# EAGLE board PCB components (EAGLE 7.2.0)
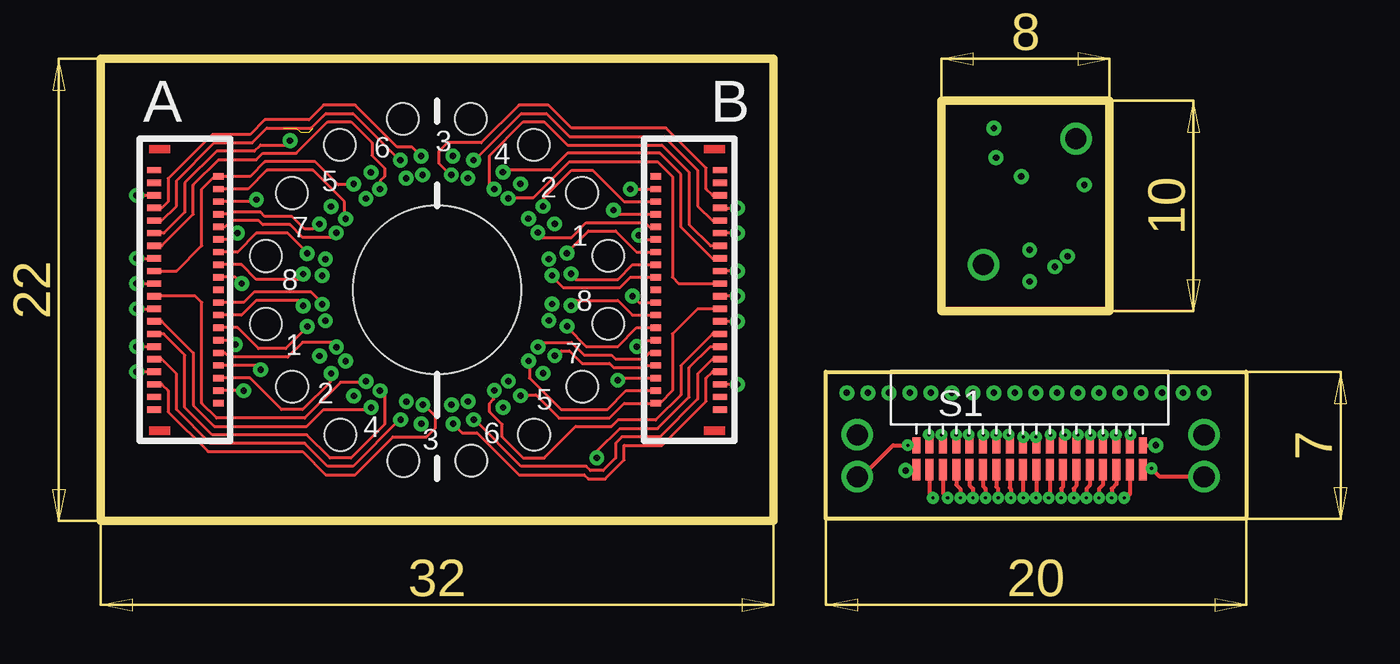
[diagram p0: board, top side]
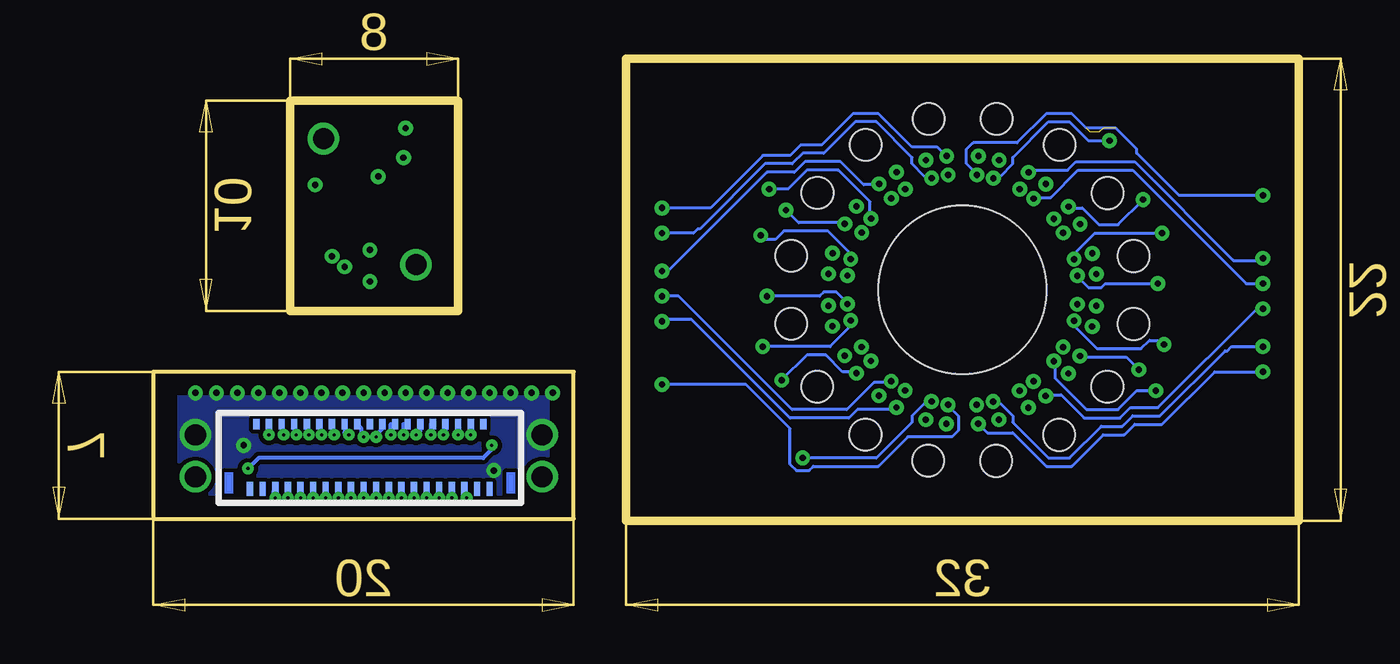
[diagram p1: board, bottom side, seen from below]

Size 54.5 x 22 mm. Coordinates in mm from the lower left corner, seen from the top.
Outline: 40,20 40,10 48,10 48,20 40,20
Outline: 0,22 32,22 32,0 0,0 0,22
Outline: 34.5,7.1 54.5,7.1 54.5,0.1 34.5,0.1 34.5,7.1
Copper layers (1*16): Top 0.035mm / dielectric 1.5mm / Bottom 0.035mm
Design rules "default": minimum track width 10mil, minimum drill 24mil, track to track 8mil, track to pad 8mil, pad to pad 8mil, via to via 8mil, smd to smd 8mil, copper to edge 40mil, drill to drill 8mil, minimum pad ring 10mil, minimum via ring 8mil, stop-mask expansion 4mil, vias tented up to drill 0mil, thermal gap 10mil
Holes 1.5 mm at 14.37,19.14 11.38,17.9 9.09,15.61 7.86,12.61 7.86,9.37 9.1,6.38 11.39,4.09 14.39,2.86 17.63,2.86 20.62,4.1 22.91,6.39 24.14,9.39 24.14,12.63 22.9,15.62 20.61,17.91 17.61,19.14
Holes 8 mm at 16,11

## Footprints (pad centres in the part's own frame; a part is rotated, then mirrored left to right if it is on the bottom)
OMNETICS_A79025 = smd 0.381 x 0.762: B1 -5.397,-1.016; B2 -4.763,-1.016; B3 -4.128,-1.016; B4 -3.493,-1.016; B5 -2.857,-1.016; B6 -2.223,-1.016; B7 -1.587,-1.016; B8 -0.953,-1.016; B9 -0.318,-1.016; B10 0.318,-1.016; B11 0.953,-1.016; B12 1.587,-1.016; B13 2.223,-1.016; B14 2.857,-1.016; B15 3.493,-1.016; B16 4.128,-1.016; B17 4.763,-1.016; B18 5.397,-1.016 | smd 0.381 x 1.016: T1 -5.397,-2.159; T2 -4.763,-2.159; T3 -4.128,-2.159; T4 -3.493,-2.159; T5 -2.857,-2.159; T6 -2.223,-2.159; T7 -1.587,-2.159; T8 -0.953,-2.159; T9 -0.318,-2.159; T10 0.318,-2.159; T11 0.953,-2.159; T12 1.587,-2.159; T13 2.223,-2.159; T14 2.857,-2.159; T15 3.493,-2.159; T16 4.128,-2.159; T17 4.763,-2.159; T18 5.397,-2.159
FPC_0.3MM_39P_BL101 = smd 0.3 x 0.5: P$1 -5.4,1.6; P$2 -4.8,1.6; P$3 -4.2,1.6; P$4 -3.6,1.6; P$5 -3,1.6; P$6 -2.4,1.6; P$7 -1.8,1.6; P$8 -1.2,1.6; P$9 -0.6,1.6; P$10 0,1.6; P$11 0.6,1.6; P$12 1.2,1.6; P$13 1.8,1.6; P$14 2.4,1.6; P$15 3,1.6; P$16 3.6,1.6; P$17 4.2,1.6; P$18 4.8,1.6; P$19 5.4,1.6 | smd 0.3 x 0.67: P$20 5.7,-1.465; P$21 5.1,-1.465; P$22 4.5,-1.465; P$23 3.9,-1.465; P$24 3.3,-1.465; P$25 2.7,-1.465; P$26 2.1,-1.465; P$27 1.5,-1.465; P$28 0.9,-1.465; P$29 0.3,-1.465; P$30 -0.3,-1.465; P$31 -0.9,-1.465; P$32 -1.5,-1.465; P$33 -2.1,-1.465; P$34 -2.7,-1.465; P$35 -3.3,-1.465; P$36 -3.9,-1.465; P$37 -4.5,-1.465; P$38 -5.1,-1.465; P$39 -5.7,-1.465

## Placement (x,y rotation side)
S1  OMNETICS_A79025  [OMNETICS_A79025]  44.2,4.6 0 top
U$1  FPC_0.3MM_39P  [FPC_0.3MM_39P_BL101]  4,11 270 top
U$2  FPC_0.3MM_39P  [FPC_0.3MM_39P_BL101]  28,11 90 top
U$3  FPC_0.3MM_39P  [FPC_0.3MM_39P_BL101]  44.2,3 0 bottom

## Library data of the parts
S1 = RHD2000
U$1-U$3 = wanlab

## Nets
B1: U$2.P$18
B2: U$1.P$18
B3: U$1.P$17
B4: U$1.P$16
B5: U$1.P$15
B6: U$1.P$14
B7: U$1.P$13
B8: U$1.P$12
B9: U$1.P$11
B10: U$1.P$9
B11: U$1.P$8
B12: U$1.P$7
B13: U$1.P$6
B14: U$1.P$5
B15: U$1.P$4
B16: U$1.P$3
B17: U$1.P$2
B18: U$2.P$2
B19: U$2.P$17
B20: U$2.P$16
B21: U$2.P$15
B22: U$2.P$14
B23: U$2.P$13
B24: U$2.P$12
B25: U$2.P$11
B26: U$2.P$9
B27: U$2.P$8
B28: U$2.P$7
B29: U$2.P$6
B30: U$2.P$5
B31: U$2.P$4
B32: U$2.P$3
B33: S1.B2 U$3.P$18
B34: S1.B17 U$3.P$2
B35: S1.B3 U$3.P$17
B36: S1.B4 U$3.P$16
B37: S1.B5 U$3.P$15
B38: S1.B6 U$3.P$14
B39: S1.B7 U$3.P$13
B40: S1.B8 U$3.P$12
B41: S1.B9 U$3.P$11
B42: S1.B10 U$3.P$9
B43: S1.B11 U$3.P$8
B44: S1.B12 U$3.P$7
B45: S1.B13 U$3.P$6
B46: S1.B14 U$3.P$5
B47: S1.B15 U$3.P$4
B48: S1.B16 U$3.P$3
GND: S1.B18 S1.T1
REF: S1.B1 S1.T18
T1: U$2.P$22
T2: U$1.P$22
T3: U$1.P$23
T4: U$1.P$24
T5: U$1.P$25
T6: U$1.P$26
T7: U$1.P$27
T8: U$1.P$28
T9: U$1.P$29
T10: U$1.P$30
T11: U$1.P$1 U$1.P$31
T12: U$1.P$32
T13: U$1.P$33
T14: U$1.P$34
T15: U$1.P$35
T16: U$1.P$36
T17: U$1.P$37
T18: U$2.P$23
T19: U$2.P$24
T20: U$2.P$25
T21: U$2.P$26
T22: U$2.P$27
T23: U$2.P$28
T24: U$2.P$29
T25: U$2.P$30
T26: U$2.P$1 U$2.P$31
T27: U$2.P$32
T28: U$2.P$33
T29: U$2.P$34
T30: U$2.P$35
T31: U$2.P$36
T32: U$2.P$37
T33: S1.T2 U$3.P$22
T34: S1.T3 U$3.P$23
T35: S1.T4 U$3.P$24
T36: S1.T5 U$3.P$25
T37: S1.T6 U$3.P$26
T38: S1.T7 U$3.P$27
T39: S1.T8 U$3.P$28
T40: S1.T9 U$3.P$29
T41: S1.T10 U$3.P$30
T42: S1.T11 U$3.P$31
T43: S1.T12 U$3.P$32
T44: S1.T13 U$3.P$33
T45: S1.T14 U$3.P$34
T46: S1.T15 U$3.P$35
T47: S1.T16 U$3.P$36
T48: S1.T17 U$3.P$37

## Tracks (layer width: path | path; a pad name or v marks a point on that pad's centre or on a via)
B1  (via drill 0.3)
  Top 0.15: v25.2,15.8 U$2.P$18
  Bottom 0.15: v25.2,15.8 24.3,15.8 23.4,16.7 21.9,16.7 20.4,15.2 20.4,14.4 v20.35,14.39
B2  (via drill 0.3)
  Top 0.15: v6.8,6.2 U$1.P$18
  Bottom 0.15: v6.8,6.2 7.7,6.2 8.6,5.3 10.1,5.3 11.6,6.8 11.6,7.6 v11.65,7.61
B3  (via drill 0.3)
  Top 0.15: U$1.P$17 7.1,6.8 8.6,5.3 9.6,5.3 10.9,6.6 10.9,7 v10.96,7.02
B4  (via drill 0.3)
  Top 0.15: U$1.P$16 7.4,7.4 7.5,7.3 v7.6,7.2
  Bottom 0.15: v7.6,7.2 8.2,7.8 10.4,7.8 v10.4,7.86
B5  (via drill 0.3)
  Top 0.15: U$1.P$15 5.9,8 6.1,7.8 8.9,7.8 9.6,8.5 11,8.5 11.2,8.3 v11.21,8.27
B6  (via drill 0.3)
  Top 0.15: U$1.P$14 6.2,8.6 v6.4,8.4
  Bottom 0.15: v10.68,9.53 10.6,9.5 10.6,9.2 9.6,8.2 7.5,8.2 7.1,8.6 6.4,8.6 v6.4,8.4
B7  (via drill 0.3)
  Top 0.15: U$1.P$13 6.5,9.2 7.5,8.2 8.8,8.2 9.8,9.2 v9.82,9.26
B8  (via drill 0.3)
  Top 0.15: U$1.P$12 6.7,9.8 7.4,10.5 9.4,10.5 9.6,10.3 v9.63,10.24
B9  (via drill 0.3)
  Top 0.15: U$1.P$11 6.8,10.4 7.3,10.9 10,10.9 10.5,10.4 v10.53,10.31
B10  (via drill 0.3)
  Top 0.15: U$1.P$9 6.4,11.6 v6.7,11.3
  Bottom 0.15: v6.7,11.3 9.2,11.3 9.4,11.1 10,11.1 10.5,11.6 v10.53,11.68
B11  (via drill 0.3)
  Top 0.15: U$1.P$8 6.7,12.2 7.4,11.5 9.4,11.5 9.6,11.7 v9.62,11.75
B12  (via drill 0.3)
  Top 0.15: U$1.P$7 6.5,12.8 7.4,13.7 8.9,13.7 9.8,12.8 v9.82,12.73
B13  (via drill 0.3)
  Top 0.15: U$1.P$6 6.2,13.4 v6.5,13.7
  Bottom 0.15: v6.5,13.7 9.7,13.7 10.6,12.8 10.6,12.5 v10.68,12.46
B14  (via drill 0.3)
  Top 0.15: v11.2,13.72 11.2,13.7 11,13.5 9.6,13.5 9,14.1 7.7,14.1 7.5,14.3 6.2,14.3 5.9,14 U$1.P$5
B15  (via drill 0.3)
  Top 0.15: U$1.P$4 6,14.6 6.1,14.7 7.6,14.7 7.8,14.5 9.1,14.5 9.7,13.9 10.1,13.9 10.3,14.1 v10.4,14.13
B16  (via drill 0.3)
  Top 0.15: U$1.P$3 7.3,15.2 v7.4,15.3
  Bottom 0.15: v7.4,15.3 8.6,14.1 9.5,14.1 10.3,14.9 10.9,14.9 v10.95,14.97
B17  (via drill 0.3)
  Top 0.15: U$1.P$2 7,15.8 7.9,16.7 10.1,16.7 11.6,15.2 11.6,14.4 v11.65,14.38
B18  (via drill 0.3)
  Top 0.15: U$2.P$2 25,6.2 24.1,5.3 21.9,5.3 20.4,6.8 20.4,7.6 v20.35,7.62
B19  (via drill 0.3)
  Top 0.15: U$2.P$17 24.9,15.2 23.4,16.7 22.4,16.7 21.1,15.4 21.1,15 v21.04,14.98
B20  (via drill 0.3)
  Top 0.15: U$2.P$16 24.6,14.6 24.5,14.7 v24.4,14.8
  Bottom 0.15: v24.4,14.8 23.8,14.2 21.6,14.2 v21.6,14.14
B21  (via drill 0.3)
  Top 0.15: U$2.P$15 26.1,14 25.9,14.2 23.1,14.2 22.4,13.5 21,13.5 20.8,13.7 v20.79,13.73
B22  (via drill 0.3)
  Top 0.15: U$2.P$14 25.8,13.4 v25.6,13.6
  Bottom 0.15: v21.32,12.47 21.4,12.5 21.4,12.8 22.4,13.8 24.5,13.8 24.9,13.4 25.6,13.4 v25.6,13.6
B23  (via drill 0.3)
  Top 0.15: U$2.P$13 25.5,12.8 24.5,13.8 23.2,13.8 22.2,12.8 v22.18,12.74
B24  (via drill 0.3)
  Top 0.15: U$2.P$12 25.3,12.2 24.6,11.5 22.6,11.5 22.4,11.7 v22.37,11.76
B25  (via drill 0.3)
  Top 0.15: U$2.P$11 25.2,11.6 24.7,11.1 22,11.1 21.5,11.6 v21.47,11.69
B26  (via drill 0.3)
  Top 0.15: U$2.P$9 25.6,10.4 v25.3,10.7
  Bottom 0.15: v25.3,10.7 22.8,10.7 22.6,10.9 22,10.9 21.5,10.4 v21.47,10.32
B27  (via drill 0.3)
  Top 0.15: U$2.P$8 25.3,9.8 24.6,10.5 22.6,10.5 22.4,10.3 v22.38,10.25
B28  (via drill 0.3)
  Top 0.15: U$2.P$7 25.5,9.2 24.6,8.3 23.1,8.3 22.2,9.2 v22.18,9.27
B29  (via drill 0.3)
  Top 0.15: U$2.P$6 25.8,8.6 v25.5,8.3
  Bottom 0.15: v25.5,8.3 22.3,8.3 21.4,9.2 21.4,9.5 v21.32,9.54
B30  (via drill 0.3)
  Top 0.15: v20.8,8.28 20.8,8.3 21,8.5 22.4,8.5 23,7.9 24.3,7.9 24.5,7.7 25.8,7.7 26.1,8 U$2.P$5
B31  (via drill 0.3)
  Top 0.15: U$2.P$4 26,7.4 25.9,7.3 24.4,7.3 24.2,7.5 22.9,7.5 22.3,8.1 21.9,8.1 21.7,7.9 v21.6,7.87
B32  (via drill 0.3)
  Top 0.15: U$2.P$3 24.7,6.8 v24.6,6.7
  Bottom 0.15: v24.6,6.7 23.4,7.9 22.5,7.9 21.7,7.1 21.1,7.1 v21.05,7.03
B33  (via drill 0.15)
  Top 0.2: S1.B2 39.4,3.58 v39.4,4.1
  Bottom 0.2: U$3.P$18 v39.4,4.1
B34  (via drill 0.15)
  Top 0.2: S1.B17 48.96,3.96 49,4 v49,4.1
  Bottom 0.2: U$3.P$2 v49,4.1
B35  (via drill 0.15)
  Top 0.2: S1.B3 40,3.58 v40,4.1
  Bottom 0.2: U$3.P$17 v40,4.1
B36  (via drill 0.15)
  Top 0.2: S1.B4 v40.7,4.1 40.7,4.2
  Bottom 0.2: U$3.P$16 40.6,4.2 v40.7,4.1
B37  (via drill 0.15)
  Top 0.2: S1.B5 41.3,3.58 v41.3,4.1
  Bottom 0.2: U$3.P$15 41.3,4.6 v41.3,4.1
B38  (via drill 0.15)
  Top 0.2: S1.B6 42,3.58 v42,4.1
  Bottom 0.2: U$3.P$14 41.8,4.3 v42,4.1
B39  (via drill 0.15)
  Top 0.2: S1.B7 42.61,3.99 42.6,4 v42.6,4.1
  Bottom 0.2: U$3.P$13 42.6,4.6 v42.6,4.1
B40  (via drill 0.15)
  Top 0.2: S1.B8 43.25,3.95 43.2,4 v43.2,4.1
  Bottom 0.2: U$3.P$12 43.2,4.6 v43.2,4.1
B41  (via drill 0.15)
  Top 0.2: S1.B9 43.88,3.88 43.9,3.9 v43.9,4
  Bottom 0.2: v43.9,4 43.9,4.1 43.6,4.4 U$3.P$11
B42  (via drill 0.15)
  Top 0.2: S1.B10 44.52,3.98 v44.5,4
  Bottom 0.2: U$3.P$9 44.6,4.4 44.6,4.1 v44.5,4
B43  (via drill 0.15)
  Top 0.2: S1.B11 45.15,3.85 45.2,3.9 v45.2,4.1
  Bottom 0.2: U$3.P$8 45.4,4.2 v45.2,4.1
B44  (via drill 0.15)
  Top 0.2: S1.B12 45.79,3.89 45.9,4 v45.9,4.1
  Bottom 0.2: U$3.P$7 46,4.2 v45.9,4.1
B45  (via drill 0.15)
  Top 0.2: S1.B13 46.42,3.82 46.5,3.9 v46.5,4.1
  Bottom 0.2: U$3.P$6 46.6,4.2 v46.5,4.1
B46  (via drill 0.15)
  Top 0.2: S1.B14 47.06,3.86 47.1,4 v47.1,4.1
  Bottom 0.2: U$3.P$5 47.2,4.1 v47.1,4.1
B47  (via drill 0.15)
  Top 0.2: S1.B15 47.69,3.99 47.7,4 v47.7,4.1
  Bottom 0.2: U$3.P$4 47.8,4.2 v47.7,4.1
B48  (via drill 0.15)
  Top 0.2: S1.B16 48.33,3.97 48.3,4 v48.3,4.1
  Bottom 0.2: U$3.P$3 48.4,4.2 v48.3,4.1
GND  (via drill 0.3, 1)
  Top 0.2: S1.B18 49.88,3.58 49.9,3.6 v50.2,3.6 | S1.T1 38.54,2.44 38.5,2.4 v38.3,2.4
  other vias: 35.5,6.1 36.5,6.1 37.5,6.1 38.5,6.1 39.5,6.1 40.5,6.1 41.5,6.1 42.5,6.1 43.5,6.1 44.5,6.1 45.5,6.1 46.5,6.1 47.5,6.1 48.5,6.1 49.5,6.1 50.5,6.1 51.5,6.1 52.5,6.1 36,4.1 52.5,4.1
  pour Bottom (isolate 0.1, rank 3, no thermals): 35,6.6 35,0.6 53.5,0.6 53.5,6.6
REF  (via drill 0.15, 1)
  Top 0.2: S1.T18 49.94,2.44 v50,2.5 | S1.B1 38.42,3.58 v38.4,3.6 37.7,3.6 36.2,2.1 v36,2.1 | 50.1,2.6 v50,2.5 | v52.5,2.1 50.4,2.1 v50,2.5
  Bottom 0.2: v38.4,3.6 38.4,3.4 38.8,3 49.5,3 v50,2.5
S$1  (via drill 0.3)
  other vias: 42.6,17.3
S$2  (via drill 0.3)
  other vias: 42.5,18.7
S$3  (via drill 0.3)
  other vias: 43.8,16.4
S$4  (via drill 0.3)
  other vias: 46.8,16
S$5  (via drill 0.3)
  other vias: 44.2,12.9
S$6  (via drill 0.3)
  other vias: 44.2,11.4
S$7  (via drill 0.3)
  other vias: 46,12.6
S$8  (via drill 0.3)
  other vias: 45.4,12.1
S$9  (via drill 1)
  other vias: 42,12.2
S$10  (via drill 1)
  other vias: 46.4,18.2
T1  (via drill 0.3)
  Top 0.15: v16.68,16.47 16.6,16.5 16.1,17 16.1,17.6 16.5,18 18.1,18 19.9,19.8 21.3,19.8 22.4,18.7 26.9,18.7 28.8,16.8 28.8,15.8 29.1,15.5 U$2.P$22
T2  (via drill 0.3)
  Top 0.15: v15.32,5.53 15.4,5.5 15.9,5 15.9,4.4 15.5,4 13.9,4 12.1,2.2 10.7,2.2 9.6,3.3 5.1,3.3 3.2,5.2 3.2,6.2 2.9,6.5 U$1.P$22
T3  (via drill 0.3)
  Top 0.15: U$1.P$23 v1.7,7.1
  Bottom 0.15: v1.7,7.1 4,7.1 6.5,4.6 7.8,4.6 8.3,4.1 9.3,4.1 10.8,2.6 12,2.6 13.6,4.2 14.8,4.2 15.2,4.6 v15.25,4.62
T4  (via drill 0.3)
  Top 0.15: U$1.P$24 2.9,7.7 3.6,7 3.6,5.3 5.2,3.7 9.7,3.7 10.8,2.6 12,2.6 14.2,4.8 v14.27,4.82
T5  (via drill 0.3)
  Top 0.15: v1.7,8.3 U$1.P$25
  Bottom 0.15: v14.54,5.68 14.5,5.6 14.2,5.6 13.6,5 13.6,4.7 11.9,3 10.9,3 9.4,4.5 8.4,4.5 7.9,5 6.6,5 3.5,8.1 3.4,8.1 3.2,8.3 v1.7,8.3
T6  (via drill 0.3)
  Top 0.15: U$1.P$26 3,8.9 4,7.9 4,5.4 5.3,4.1 9.8,4.1 10.9,3 11.9,3 13.5,4.6 13.5,6 13.3,6.2 v13.28,6.2
T7  (via drill 0.3)
  Top 0.15: U$1.P$27 2.9,9.5 4.4,8 4.4,5.5 5.4,4.5 9.8,4.5 10.6,5.3 12.8,5.3 v12.86,5.4
T8  (via drill 0.3)
  Top 0.15: v1.7,10.1 U$1.P$28
  Bottom 0.15: v12.03,5.95 12,6 11.3,6 10.2,4.9 8.5,4.9 8,5.4 6.7,5.4 2,10.1 v1.7,10.1
T9  (via drill 0.3)
  Top 0.15: v12.62,6.65 12.6,6.6 11.4,6.6 9.7,4.9 5.5,4.9 4.8,5.6 4.8,10.4 4.5,10.7 U$1.P$29
T10  (via drill 0.3)
  Top 0.15: v1.7,11.3 U$1.P$30
  Bottom 0.15: v1.7,11.3 2.5,11.3 7.9,16.7 10.5,16.7 11.8,15.4 12.6,15.4 v12.61,15.35
T11  (via drill 0.3)
  Top 0.15: v12.02,16.04 12,16 11.3,16 10.2,17.1 7.8,17.1 7.1,16.4 U$1.P$1 5.4,16.4 4.8,15.8 4.8,13.1 3.6,11.9 U$1.P$31
T12  (via drill 0.3)
  Top 0.15: v1.7,12.5 U$1.P$32
  Bottom 0.15: v12.86,16.6 12.8,16.6 12.7,16.7 11,16.7 10.6,17.1 7.8,17.1 3.1,12.4 1.9,12.4 1.8,12.5 v1.7,12.5
T13  (via drill 0.3)
  Top 0.15: U$1.P$33 2.9,13.1 4.4,14.6 4.4,16 5.6,17.2 7.4,17.2 7.7,17.5 9.3,17.5 10.8,19 11.9,19 12.9,18 12.9,17.4 13.5,16.8 13.5,16.4 13.3,16.2 13.3,15.8 v13.27,15.79
T14  (via drill 0.3)
  Top 0.15: U$1.P$34 3,13.7 4,14.7 4,16.1 5.5,17.6 7.3,17.6 7.6,17.9 8.8,17.9 v9,18.1
  Bottom 0.15: v9,18.1 10,18.1 10.9,19 11.9,19 13.6,17.3 13.6,17 14.2,16.4 14.5,16.4 v14.53,16.32
T15  (via drill 0.3)
  Top 0.15: U$1.P$35 2.9,14.3 3.6,15 3.6,16.2 5.4,18 7.2,18 7.9,18.7 10,18.7 10.7,19.4 12,19.4 14.2,17.2 v14.26,17.18
T16  (via drill 0.3)
  Top 0.15: U$1.P$36 2.9,14.9 3.2,15.2 3.2,16.3 5.3,18.4 7.1,18.4 7.8,19.1 9.9,19.1 10.6,19.8 12.1,19.8 14.1,17.8 14.8,17.8 15.2,17.4 v15.24,17.37
T17  (via drill 0.3)  (4 unrouted)
  Top 0.15: v1.7,15.5 U$1.P$37
  Bottom 0.15: v1.7,15.5 5.7,15.5 7.7,17.5 7.7,17.7 8.7,18.7 10.1,18.7 10.8,19.4 12,19.4 13.4,18 15.5,18 15.8,17.7 15.8,17 15.32,16.52 v15.32,16.47
T18  (via drill 0.3)
  Top 0.15: U$2.P$23 v30.3,14.9
  Bottom 0.15: v30.3,14.9 28,14.9 25.5,17.4 24.2,17.4 23.7,17.9 22.7,17.9 21.2,19.4 20,19.4 18.4,17.8 17.2,17.8 16.8,17.4 v16.75,17.38
T19  (via drill 0.3)
  Top 0.15: U$2.P$24 29.1,14.3 28.4,15 28.4,16.7 26.8,18.3 22.3,18.3 21.2,19.4 20,19.4 17.8,17.2 v17.73,17.18
T20  (via drill 0.3)
  Top 0.15: v30.3,13.7 U$2.P$25
  Bottom 0.15: v17.46,16.32 17.5,16.4 17.8,16.4 18.4,17 18.4,17.3 20.1,19 21.1,19 22.6,17.5 23.6,17.5 24.1,17 25.4,17 28.5,13.9 28.6,13.9 28.8,13.7 v30.3,13.7
T21  (via drill 0.3)
  Top 0.15: U$2.P$26 29,13.1 28,14.1 28,16.6 26.7,17.9 22.2,17.9 21.1,19 20.1,19 18.5,17.4 18.5,16 18.7,15.8 v18.72,15.8
T22  (via drill 0.3)
  Top 0.15: U$2.P$27 29.1,12.5 27.6,14 27.6,16.5 26.6,17.5 22.2,17.5 21.4,16.7 19.2,16.7 v19.14,16.6
T23  (via drill 0.3)
  Top 0.15: v30.3,11.9 U$2.P$28
  Bottom 0.15: v19.97,16.05 20,16 20.7,16 21.8,17.1 23.5,17.1 24,16.6 25.3,16.6 30,11.9 v30.3,11.9
T24  (via drill 0.3)
  Top 0.15: v19.38,15.35 19.4,15.4 20.6,15.4 22.3,17.1 26.5,17.1 27.2,16.4 27.2,11.6 27.5,11.3 U$2.P$29
T25  (via drill 0.3)
  Top 0.15: v30.3,10.7 U$2.P$30
  Bottom 0.15: v30.3,10.7 29.5,10.7 24.1,5.3 21.5,5.3 20.2,6.6 19.4,6.6 v19.39,6.65
T26  (via drill 0.3)
  Top 0.15: v19.98,5.96 20,6 20.7,6 21.8,4.9 24.2,4.9 24.9,5.6 U$2.P$1 26.6,5.6 27.2,6.2 27.2,8.9 28.4,10.1 U$2.P$31
T27  (via drill 0.3)
  Top 0.15: v30.3,9.5 U$2.P$32
  Bottom 0.15: v19.14,5.4 19.2,5.4 19.3,5.3 21,5.3 21.4,4.9 24.2,4.9 28.9,9.6 30.1,9.6 30.2,9.5 v30.3,9.5
T28  (via drill 0.3)
  Top 0.15: U$2.P$33 29.1,8.9 27.6,7.4 27.6,6 26.4,4.8 24.6,4.8 24.3,4.5 22.6,4.5 21.1,3 20.1,3 19.1,4 19.1,4.6 18.5,5.2 18.5,5.6 18.7,5.8 18.7,6.2 v18.73,6.21
T29  (via drill 0.3)
  Top 0.15: U$2.P$34 29,8.3 28,7.3 28,5.9 26.5,4.4 24.7,4.4 23.6,3.3 v23.6,3
  Bottom 0.15: v17.47,5.68 17.5,5.6 17.8,5.6 18.4,5 18.4,4.7 20.1,3 v23.6,3
T30  (via drill 0.3)
  Top 0.15: U$2.P$35 29.1,7.7 28.4,7 28.4,5.8 26.6,4 24.8,4 24.5,3.7 24.5,3 23.9,2.4 23.3,2.4 23.1,2.6 20,2.6 17.8,4.8 v17.74,4.82
T31  (via drill 0.3)
  Top 0.15: U$2.P$36 29.1,7.1 28.8,6.8 28.8,5.7 26.7,3.6 24.9,3.6 24.9,2.9 24,2 23.2,2 23,2.2 19.9,2.2 17.9,4.2 17.2,4.2 16.8,4.6 v16.76,4.63
T32  (via drill 0.3)
  Top 0.15: v30.3,6.5 U$2.P$37
  Bottom 0.15: v30.3,6.5 26.3,6.5 24.2,4.4 24.2,2.7 23.9,2.4 23.3,2.4 23.1,2.6 20,2.6 18.6,4 16.5,4 16.2,4.3 16.2,5 16.68,5.49 v16.68,5.53
T33  (via drill 0.15)
  Top 0.2: S1.T2 39.44,1.26 v39.6,1.1
  Bottom 0.15: U$3.P$22 39.7,1.3
  Bottom 0.2: U$3.P$22 39.63,1.53 | 39.7,1.3 39.7,1.2 v39.6,1.1
T34  (via drill 0.15)
  Top 0.2: S1.T3 40.07,1.33 v40.3,1.1
  Bottom 0.2: U$3.P$23 v40.3,1.1
T35  (via drill 0.15)
  Top 0.2: S1.T4 40.71,1.73 U$3.P$24 v40.9,1.1
  Bottom 0.2: U$3.P$24 v40.9,1.1
T36  (via drill 0.15)
  Top 0.2: S1.T5 41.34,1.69 U$3.P$25 v41.5,1.1
  Bottom 0.2: U$3.P$25 v41.5,1.1
T37  (via drill 0.15)
  Top 0.2: S1.T6 41.98,1.66 U$3.P$26 v42.1,1.1
  Bottom 0.2: U$3.P$26 v42.1,1.1
T38  (via drill 0.15)
  Top 0.2: S1.T7 42.61,1.62 U$3.P$27 v42.7,1.1
  Bottom 0.2: U$3.P$27 v42.7,1.1
T39  (via drill 0.15)
  Top 0.2: S1.T8 43.25,1.59 U$3.P$28 v43.3,1.1
  Bottom 0.2: U$3.P$28 v43.3,1.1
T40  (via drill 0.15)
  Top 0.2: S1.T9 43.88,1.12 v43.9,1.1
  Bottom 0.2: U$3.P$29 v43.9,1.1
T41  (via drill 0.15)
  Top 0.2: S1.T10 44.52,1.12 v44.5,1.1
  Bottom 0.2: U$3.P$30 v44.5,1.1
T42  (via drill 0.15)
  Top 0.2: S1.T11 45.15,1.15 v45.1,1.1
  Bottom 0.2: U$3.P$31 v45.1,1.1
T43  (via drill 0.15)
  Top 0.2: S1.T12 45.79,1.62 U$3.P$32 v45.7,1.1
  Bottom 0.2: U$3.P$32 v45.7,1.1
T44  (via drill 0.15)
  Top 0.2: S1.T13 46.42,1.66 U$3.P$33 v46.3,1.1
  Bottom 0.2: U$3.P$33 v46.3,1.1
T45  (via drill 0.15)
  Top 0.2: S1.T14 47.06,1.69 U$3.P$34 v46.9,1.1
  Bottom 0.2: U$3.P$34 v46.9,1.1
T46  (via drill 0.15)
  Top 0.2: S1.T15 47.69,1.73 U$3.P$35 v47.5,1.1
  Bottom 0.2: U$3.P$35 v47.5,1.1
T47  (via drill 0.15)
  Top 0.2: S1.T16 48.33,1.76 U$3.P$36 v48.1,1.1
  Bottom 0.2: U$3.P$36 v48.1,1.1
T48  (via drill 0.15)
  Top 0.2: S1.T17 48.96,1.26 48.86,1.26 v48.7,1.1
  Bottom 0.2: U$3.P$37 48.7,1.5 48.8,1.4 48.8,1.2 v48.7,1.1

## Text on the board
tPlace: A | 3 | B | 4 | 6 | 5 | 2 | 7 | 1 | 8 | 8 | 1 | 7 | 2 | 5 | 6 | 4 | 3